# Altium PCB ALCS_REMOTE v2.PcbDoc
Units mil, origin at the board's own origin, x right, y up, seen from the top; angles counter-clockwise.
Board outline 3930 x 4525 mil, 2 copper layers (Top Layer, Bottom Layer); 59 components, 58 nets, 266 pads, 20 vias.
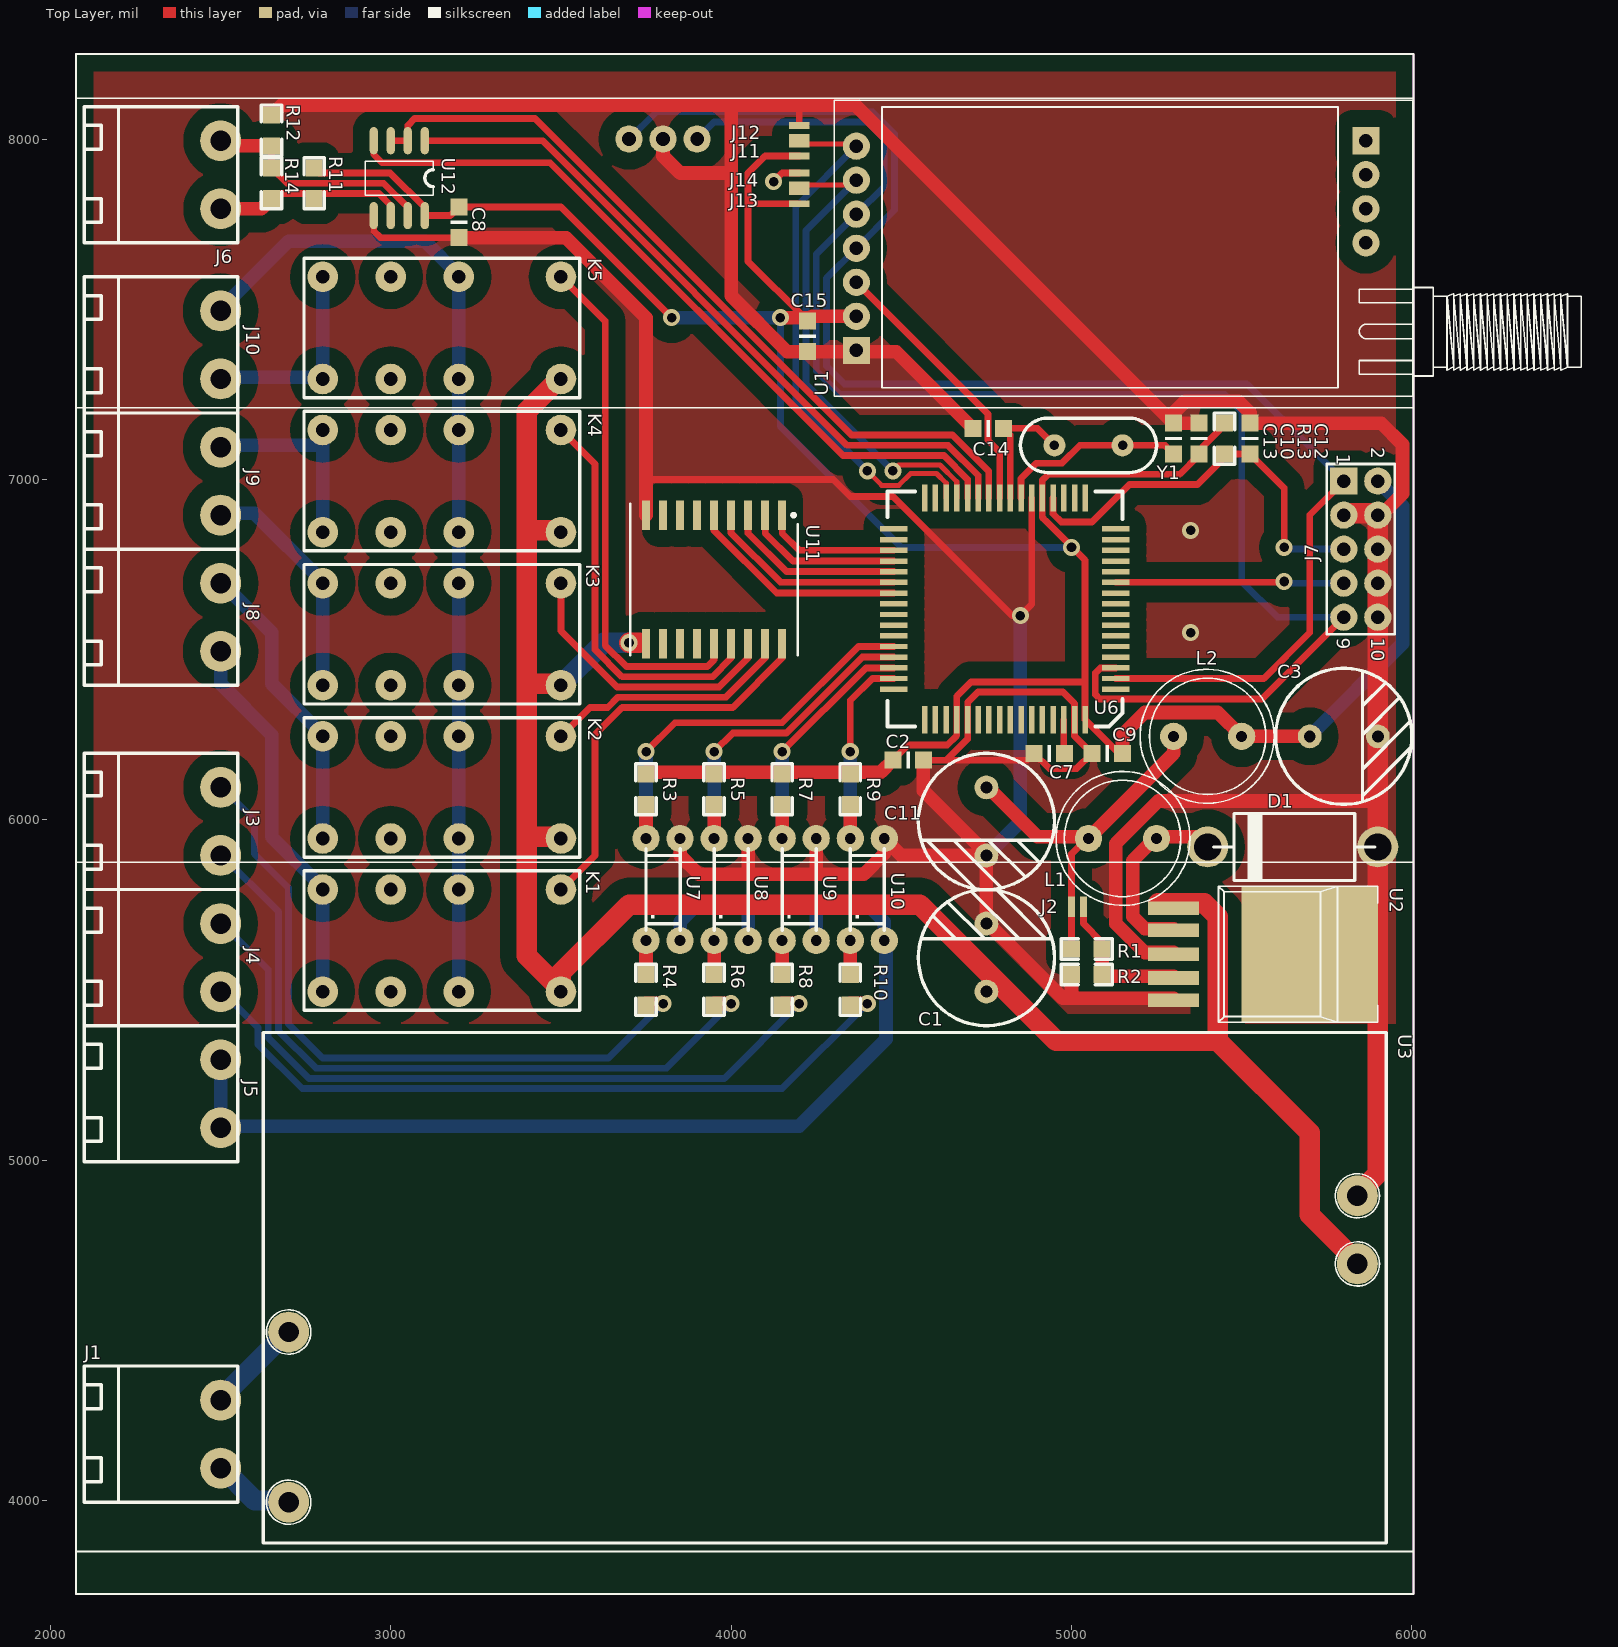
[diagram p0: Top Layer view]
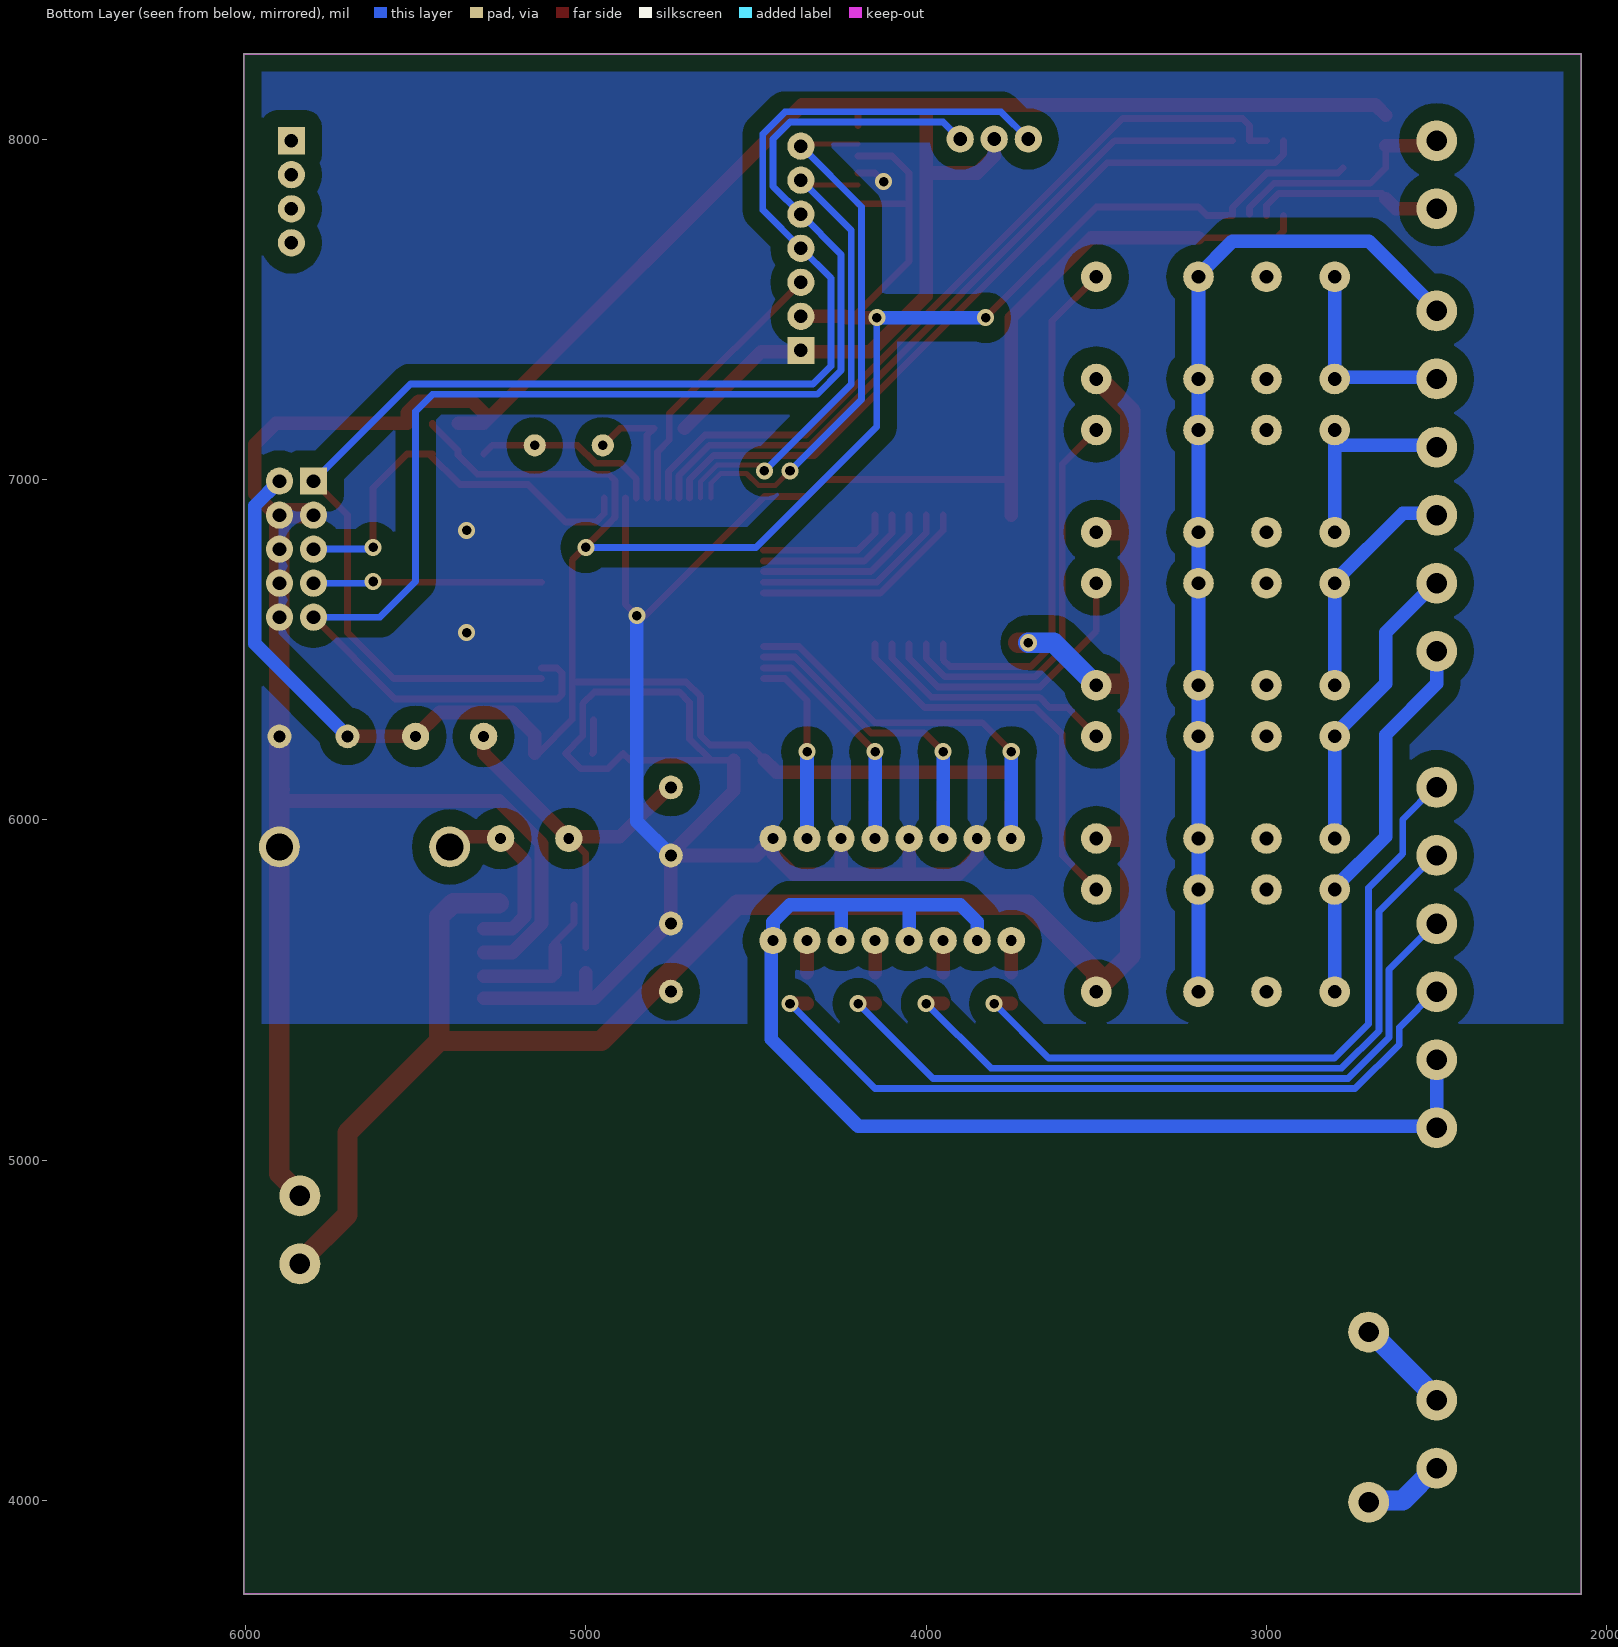
[diagram p1: Bottom Layer view, seen from below]
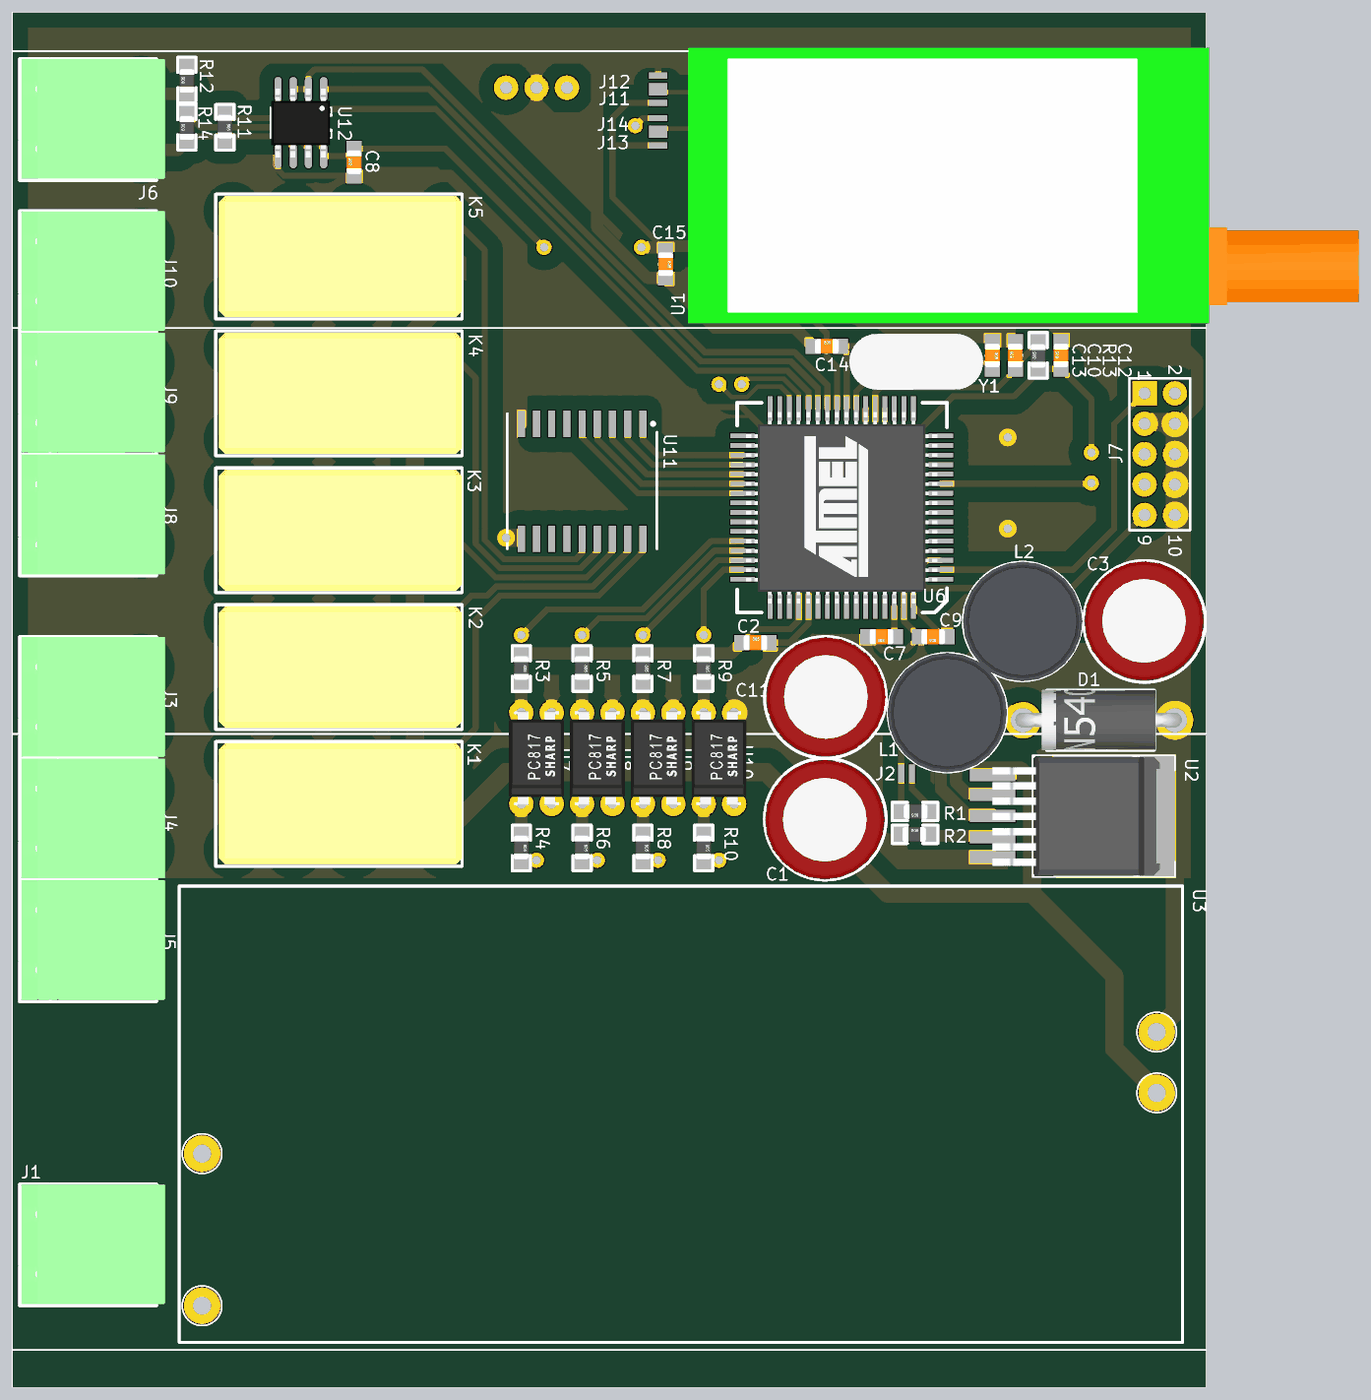
[diagram p2: 3D render of the assembled board from above, using the file's embedded part models]

## Layer stack, top to bottom
Top Solder: solder mask 0.4, Solder Resist, Dk 3.5
Top Layer: signal copper 1.4
Dielectric 1: dielectric 12.6, FR-4, Dk 4.8
Bottom Layer: signal copper 1.4
Bottom Solder: solder mask 0.4, Solder Resist, Dk 3.5

## Board outline
2075,3725 6005,3725 6005,8250 2075,8250

## Design rules (kind name [scope] priority, off if disabled: settings)
Clearance [All] p1: gap=10 ignorepadtopadclearanceinfootprint=FALSE except(0: Arc-Hole Track-Hole SMDPad-Hole THPad-Hole Via-Hole Fill-Hole Poly-Hole Region-Hole Text-Hole; 50: Arc-Poly Track-Poly SMDPad-Poly THPad-Poly Via-Poly Fill-Poly Poly-Poly)
ComponentClearance [All] p1 off: gap=10 collisioncheckmode=3 verticalgap=10 showdistances=FALSE
Height [All] p1 off: minheight=0 maxheight=1000 prefheight=500
PolygonConnect [All] p1: connectstyle=Direct reliefconductorwidth=10 reliefentries=4 polygonreliefangle="90 Angle" airgapwidth=10
RoutingVias [All] p1: holewidth=28 width=50 viastyle="Through Hole" minholewidth=28 minwidth=50 maxholewidth=28 maxwidth=50
SolderMaskExpansion [All] p1: expansion=4
Width [All] p1: maxlimit=100 minlimit=10 preferedwidth=20
28 further rules are at their usual default settings.

## Components (designator, comment, footprint, x,y, rotation, side; value= is the part's Value field where it differs from the comment)
C1 "Tụ hóa chân cắm 1000uF 25V" CAP40X20 4750,5495 r90 top value="1000uF 25V"
C2 "Tụ hóa chân cắm 1000uF 25V" CAP40X20 4750,6095 r270 top value="1000uF 25V"
C3 "Tụ hóa chân cắm 1000uF 25V" CAP40X20 5700,6245 r0 top value="1000uF 25V"
C7 "Tụ điện dán 0805 104" 0805C 4980,6195 r180 top value=104
C8 "Tụ điện dán 0805 104" 0805C 3200,7710 r90 top value=104
C9 "Tụ điện dán 0805 104" 0805C 5150,6195 r180 top value=104
C10 "Tụ điện dán 0805 104" 0805C 5375,7075 r90 top value=104
C11 "Tụ điện dán 0805 104" 0805C 4475,6175 r0 top value=104
C12 "Tụ điện dán 0805 104" 0805C 5525,7075 r90 top value=104
C13 "Tụ điện dán 0805 22p" 0805C 5300,7165 r270 top value=22p
C14 "Tụ điện dán 0805 22p" 0805C 4710,7150 r0 top value=22p
C15 "Tụ điện dán 0805 104" 0805C 4225,7465 r270 top value=104
D1 "Diode xung chân cắm 3A 1N5408" 1N5408 5950,5920 r180 top value=1N5408
J1 "Giắc xanh loại nằm, 300V/16A - 5.08mm 2P" JACK2_CAM 2500,4095 r90 top value=2P
J2 "Jumper OPTION JUMP" XPAD 5000,5745 r0 top value="OPTION JUMP"
J3 "Giắc xanh loại nằm, 300V/16A - 5.08mm 2P" JACK2_CAM 2500,5895 r90 top value=2P
J4 "Giắc xanh loại nằm, 300V/16A - 5.08mm 2P" JACK2_CAM 2500,5495 r90 top value=2P
J5 "Giắc xanh loại nằm, 300V/16A - 5.08mm 2P" JACK2_CAM 2500,5095 r90 top value=2P
J6 "Giắc xanh loại nằm, 300V/16A - 5.08mm 2P" JACK2_CAM 2500,7795 r90 top value=2P
J7 "Jump đực chân thẳng, 2 hàng chân 2.54mm 10P" HDR2x5 5800,6995 r270 top value=ICSP
J8 "Giắc xanh loại nằm, 300V/16A - 5.08mm 2P" JACK2_CAM 2500,6495 r90 top value=2P
J9 "Giắc xanh loại nằm, 300V/16A - 5.08mm 2P" JACK2_CAM 2500,6895 r90 top value=2P
J10 "Giắc xanh loại nằm, 300V/16A - 5.08mm 2P" JACK2_CAM 2500,7295 r90 top value=2P
J11 "Jumper OPTION JUMP" XPAD 4200,7985 r270 top value="OPTION JUMP"
J12 "Jumper OPTION JUMP" XPAD 4200,8040 r270 top value="OPTION JUMP"
J13 "Jumper OPTION JUMP" XPAD 4200,7845 r270 top value="OPTION JUMP"
J14 "Jumper OPTION JUMP" XPAD 4200,7900 r270 top value="OPTION JUMP"
K1 "Relay OMRON, 8 chân cắm G12V-2" Relay 3200,5495 r270 top value=G12V-2
K2 "Relay OMRON, 8 chân cắm G12V-2" Relay 3200,5945 r270 top value=G12V-2
K3 "Relay OMRON, 8 chân cắm G12V-2" Relay 3200,6395 r270 top value=G12V-2
K4 "Relay OMRON, 8 chân cắm G12V-2" Relay 3200,6845 r270 top value=G12V-2
K5 "Relay OMRON, 8 chân cắm G12V-2" Relay 3200,7295 r270 top value=G12V-2
L1 "Cuộn cảm chân cắm lõi trụ 330uH/3A" CAMTRONDUNG 5249.37,5945 r180 top value=330uH/3A
L2 "Cuộn cảm chân cắm lõi trụ 10uH/3A" CAMTRONDUNG 5300.63,6245 r0 top value=10uH/3A
R1 "Điện trở dán 0805 5K6" 0805DD 5090,5620 r180 top value=5K6
R2 "Điện trở dán 0805 1K8" 0805DD 5000,5545 r0 top value=1K8
R3 "Điện trở dán 0805 1K8" 0805DD 3750,6135 r270 top value=1K8
R4 "Điện trở dán 0805 4K7" 0805DD 3750,5545 r270 top value=4K7
R5 "Điện trở dán 0805 1K8" 0805DD 3950,6135 r270 top value=1K8
R6 "Điện trở dán 0805 4K7" 0805DD 3950,5545 r270 top value=4K7
R7 "Điện trở dán 0805 1K8" 0805DD 4150,6135 r270 top value=1K8
R8 "Điện trở dán 0805 4K7" 0805DD 4150,5545 r270 top value=4K7
R9 "Điện trở dán 0805 1K8" 0805DD 4350,6135 r270 top value=1K8
R10 "Điện trở dán 0805 4K7" 0805DD 4350,5545 r270 top value=4K7
R11 "Điện trở dán 0805 1K" 0805DD 2775,7915 r270 top value=1K
R12 "Điện trở dán 0805 1K" 0805DD 2650,7980 r90 top value=1K
R13 "Điện trở dán 0805 100K" 0805DD 5450,7075 r90 top value=100K
R14 "Điện trở dán 0805 330R" 0805DD 2650,7825 r90 top value=330R
U1 "Module thu phát không dây RF E32-TTL-1W" RF_AS32 4368,7379 r0 top locked value=E32-TTL-1W
U2 "IC chuyển đổi nguồn, chân dán LM2576 ADJ" TO220_5CSMD2 5300,5740 r270 top value="LM2576 ADJ"
U3 "Module nguồn AC-DC 14.2V" PS15V2A 2700,3995 r0 top value="POWER SUPPLY"
U6 "Vi điều khiển ATMEL chân dán ATMEGA128" QFP64-3 5130,6384 r180 top locked value=ATMEGA128
U7 "Cách ly quang chân cắm TLP521-1" TLP521_1 3750,5645 r270 top value=TLP521-1
U8 "Cách ly quang chân cắm TLP521-1" TLP521_1 3950,5645 r270 top value=TLP521-1
U9 "Cách ly quang chân cắm TLP521-1" TLP521_1 4150,5645 r270 top value=TLP521-1
U10 "Cách ly quang chân cắm TLP521-1" TLP521_1 4350,5645 r270 top value=TLP521-1
U11 "IC đệm chân dán ULN2803" SO-J18/C9.6 3950,6706.02 r180 top value=ULN2803
U12 "IC truyền thông chân dán MAX485" SO-8 3100,7995 r270 top value=MAX485
Y1 "Thạch anh chân cắm 14.7456 MHz" XTAL 5150,7100 r180 top value="14.7456 MHz"

## Footprints (in the part's own frame and the unit in brackets; to place one, negate y for a bottom-side part, rotate by r counter-clockwise, add the part's x,y. Pads: shape width x height; smd on the part's side, far side on the other; paste and mask are expansions set on the pad)
1N5408 [mil]
  round 120 hole 80: 1(50,0) 2(550,0)
  silkscreen extent 59,-98 531,98, body extent 28,-100 575,98, height 229
0805C [mil]
  rect 50x50 smd: 1(0,0) 2(90,0)
  silkscreen extent 40,-25 50,25, body extent 6,-25 84,25, height 31
0805DD [mil]
  rect 50x50 smd: 1(0,0) 2(90,0)
  silkscreen extent -30,-30 120,30, body extent 4,-25 82,25, height 31
CAMTRONDUNG [mil]
  round 80 hole 32: 1(-0.63,0) 2(199.37,0)
  silkscreen extent -99,-197 294,197, body extent -98,-197 295,197, height 537
CAP40X20 [mil]
  round 70 hole 35: 1(0,0) 2(200,0)
  silkscreen extent -100,-200 300,200, body extent -99,-195 295,199, height 473
HDR2x5 [mil] "Connector; Header; 5x2 Position"
  rect 80x80 hole 40: 1(0,0)
  round 80 hole 40: 2(0,100) 3(100,0) 4(100,100) 5(200,0) 6(200,100) 7(300,0) 8(300,100) 9(400,0) 10(400,100)
  silkscreen extent -50,-50 450,150
JACK2_CAM [mil]
  round 120 hole 60: 1(0,0) 2(200,0)
  silkscreen extent -100,-50 300,400, body extent -95,-78 299,394, height 339
PS15V2A [mil]
  round 120 hole 60: 1(0,0) 2(0,500) 3(3140,900) 4(3140,700)
  silkscreen extent -75,-120 3225,1380
QFP64-3 [mil]
  rect 80x16 smd: 1(0,0) 2(0,-31) 3(0,-62) 4(0,-94) 5(0,-125) 6(0,-157) 7(0,-188) 8(0,-219) 9(0,-251) 10(0,-282) 11(0,-314) 12(0,-345) 13(0,-376) 14(0,-408) 15(0,-439) 16(0,-471) 33(652,-471) 34(652,-439) 35(652,-408) 36(652,-376) 37(652,-345) 38(652,-314) 39(652,-282) 40(652,-251) 41(652,-219) 42(652,-188) 43(652,-157) 44(652,-125) 45(652,-94) 46(652,-62) 47(652,-31) 48(652,0)
  rect 16x80 smd: 17(90,-561) 18(121,-561) 19(153,-561) 20(184,-561) 21(216,-561) 22(247,-561) 23(278,-561) 24(310,-561) 25(341,-561) 26(373,-561) 27(404,-561) 28(435,-561) 29(467,-561) 30(498,-561) 31(530,-561) 32(561,-561) 49(561,90) 50(530,90) 51(498,90) 52(467,90) 53(435,90) 54(404,90) 55(373,90) 56(341,90) 57(310,90) 58(278,90) 59(247,90) 60(216,90) 61(184,90) 62(153,90) 63(121,90) 64(90,90)
  silkscreen extent -20,-580 670,110, body extent 11,-549 641,81, height 44
Relay [mil]
  round 90 hole 40: 1(0,0) 2(0,-200) 3(0,-400) 4(-300,0) 5(-300,-200) 6(-300,-400) 7(0,300) 8(-300,300)
  silkscreen extent -355,-455 55,355, body extent -349,-445 49,355, height 449
RF_AS32 [mil]
  round 80 hole 40: 0(1497,316) 0(1497,416) 0(1497,516) 2(0,100) 3(0,200) 4(0,300) 5(0,400) 6(0,500) 7(0,600)
  rect 80x80 hole 40: 0(1497,616) 1(0,0)
  silkscreen extent -65,-135 2130,735, body extent -68,-154 2136,752, height 532
SO-8 [mil]
  oval 80x24 smd: 1(0,0) 2(0,-50) 3(0,-100) 4(0,-150) 5(220,-150) 6(220,-100) 7(220,-50) 8(220,0)
  silkscreen extent 60,-175 160,25, body extent -2,-172 225,21, height 57
SO-J18/C9.6 [mm] "SOJ; 18 Leads; Body Width 10.16 mm; Pitch 1.27 mm"
  rect 0.6x2.2 smd: 1(-5.08,-4.8) 2(-3.81,-4.8) 3(-2.54,-4.8) 4(-1.27,-4.8) 5(0,-4.8) 6(1.27,-4.8) 7(2.54,-4.8) 8(3.81,-4.8) 9(5.08,-4.8) 10(5.08,4.8) 11(3.81,4.8) 12(2.54,4.8) 13(1.27,4.8) 14(0,4.8) 15(-1.27,4.8) 16(-2.54,4.8) 17(-3.81,4.8) 18(-5.08,4.8)
  silkscreen extent -6.25,-5.65 6.25,5.65
TLP521_1 [mil]
  round 80 hole 32: 1(0,0) 2(0,100) 3(-300,100) 4(-300,0)
  silkscreen extent -270,0 -30,100, body extent -305,-40 5,140, height 138
TO220_5CSMD2 [mil]
  rect 40x150 smd: 1(0,0) 2(65,0) 3(135,0) 4(205,0) 5(270,0)
  rect 400x400 smd: 3(135,400)
  silkscreen extent -65,132 335,600, body extent -59,0 331,551, height 166
XPAD [mil]
  rect 20x60 smd: 1(0,0) 2(35,0)
XTAL [mil]
  round 65 hole 28: 1(0,0) 2(200,0)
  silkscreen extent -100,-80 300,80, body extent -119,-91 321,93, height 142

## Part data
C1 C2 C3: library part "Cap Pol1", "Polarized Capacitor (Radial)", Type1="T? hóa chân c?m", Type2="T? hóa chân dán"
C7 C8 C9 C10 C11 C12 C15: library part CAP, Type1="T? di?n dán 0805", Type2="T? di?n chân c?m"
C13 C14: library part Cap, Type1="T? di?n dán 0805", Type2="T? di?n chân c?m"
D1: library part DIODE, Type1="Diode xung chân c?m 3A", Type2="Diode ch?nh luu chân c?m 1A", Type3="Diode ch?nh luu chân c?m 3A"
J1 J2 J3 J4 J5 J6 J8 J9 J10 J11 J12 J13 J14: library part CON2, Type1="Gi?c xanh lo?i n?m, 300V/16A - 5.08mm", Type2="Jump d?c lo?i th?ng, 2.54mm", Type3=Jumper, Type4="Gi?c xanh lo?i n?m, 300V/16A - 3.81mm"
J7: library part "HEADER 5X2"
K1 K2 K3 K4 K5: library part Relay-DPDT, "Dual-Pole Dual-Throw Relay", Type1="Relay OMRON, 8 chân c?m"
L1 L2: library part INDUCTORSMALL, Type1="Cu?n c?m chân c?m lõi tr?", Type2="Cu?n c?m chân c?m lõi xuy?n"
R1 R2 R3 R4 R5 R6 R7 R8 R9 R10 R11 R12 R13 R14: library part "Res Semi", "Semiconductor Resistor", Type1="Ði?n tr? dán 0805", Type2="Ði?n tr? chân c?m 1/4W", Type3="Ði?n tr? chân c?m 2W"
U1: library part AS32-TTL-1W, "AS32-TTL-1W", Type1="Module thu phát không dây RF"
U2: library part LM2576, Type1="IC chuy?n d?i ngu?n, chân dán", Type2="IC chuy?n d?i ngu?n, chân c?m"
U3: library part SACACQUY
U6: library part ATmega64-16AC, "8-Bit AVR Microcontroller with 64K Bytes of In-System Programmable Flash Memory", Type1="Vi di?u khi?n ATMEL chân dán"
U7 U8 U9 U10: library part OPTOISO1, "Optoisolator", Type1="Cách ly quang chân c?m"
U11: library part ULN2803, Type1="IC d?m chân dán", Type2="IC d?m chân c?m"
U12: library part DS75176BN(8), "Multipoint RS-485/RS-422 Transceivers", Type1="IC truy?n thông chân dán", Type2="IC truy?n thông chân c?m"
Y1: library part XTAL, "Crystal Oscillator", Type1="Th?ch anh chân c?m", Type2="Th?ch anh chân dán"

## Free pads (board coordinates)
  round 80 hole 40: 0(3900,8000) 2(3700,8000) 3(3800,8000)

## Via types
v1: diameter 50, hole 28, Top Layer to Bottom Layer, 20 vias

## Nets (pads, with @x,y where several pads share a name; then routed paths per layer and width w, separated by ;. In a path a pad name is that pad's centre, name@x,y a point inside that pad or via, vN(x,y) a via of type N, cw(c..) or ccw(c..) an arc to the next point about the centre after c; other vN are vias at no path point)
+5: C2.1 J2.1 L1.2 L2.1 R1.2 | length 1086.4
  Top Layer w20: R1.2@5000,5625 5000,5900 L1.2@5050,5950
  Top Layer w40: C2.1@4750,6100 4900,5950 L1.2@5025,5950 ; L1.2 5300,6195 L2.1
A: J6.1 R11.2 R14.1 U12.6 | length 547
  Top Layer w20: R14.1@2660,7840 2965.15,7840 3000,7805.15 U12.6
  Top Layer w40: J6.1 2620,7795 R14.1
B: J6.2 R12.1 R14.2 U12.7 | length 689.9
  Top Layer w20: R12.1 R14.2 2695,7870 2978.25,7870 3050,7798.25 U12.7@3050,7780
  Top Layer w40: J6.2@2500,8000 2520,7980 R12.1
COMMON: J10.2 K1.1 K1.4 K2.1 K2.4 K3.1 K3.4 K4.1 K4.4 K5.1 K5.4 | length 2924.3
  Bottom Layer w40: J10.2@2500,7500 2700,7700 3100,7700 3200,7600 3200,7300 3200,7150 3200,6850 3200,6700 3200,6400 3200,6250 3200,5950 3200,5800 K1.1@3200,5500
DE/RE: U6.26 U12.2 U12.3 | length 2317.8
  Top Layer w20: U12.3 U12.2 3050,8040 3070,8060 3423.43,8060 4353.43,7130 4650,7130 4757,7023 U6.26
FB0: U6.35 U11.1 | length 401.9
  Top Layer w20: U11.1 4150,6841.69 4199.69,6792 U6.35
FB1: U6.36 U11.2 | length 465.1
  Top Layer w20: U11.2 4100,6841.69 4181.69,6760 U6.36
FB2: U6.37 U11.3 | length 528
  Top Layer w20: U11.3 4050,6841.69 4162.69,6729 U6.37
FB3: U6.38 U11.4 | length 590.4
  Top Layer w20: U11.4 4000,6842.43 4144.43,6698 U6.38
FB4: U6.39 U11.5 | length 649.2
  Top Layer w20: U11.5 3950,6850 4134,6666 U6.39
FB5: U11.6
FB6: U11.7
FB7: U11.8
GND: C1.2 C2.2 C3.2 C7.2 C8.1 C9.2 C10.2 C11.2 C12.2 C13.1 C14.1 C15.2 D1.1 J7.3 J7.4 J7.6 J7.8 J7.10 J12.1 J14.1 pad.3 R2.1 R12.2 U1.1 U2.3 U2.5 U3.3 U6.22 U6.53 U6.63 U7.3 U8.3 U9.3 U10.3 U11.9 U12.5 | length 17101.6
  Top Layer w20: U12.5 2950,7730 2970,7710 C8.1 ; 3750,7000 4300,7000 4350,6950 4475,6950 4825,6600 v1(4850,6600) 4883,6633 U6.22 ; v1(4125,7875) 4150,7900 J14.1 ; J12.1 4200,8095 4205,8100 ; C11.2 4632.43,6175 ; 4632.43,6175 4870,6175 C7.2 4935,6150 5015,6150 C9.2 5009,6246 U6.63 5009,6341 4975,6375 4725,6375 4695,6345 U6.53 4695,6237.57 4632.43,6175
  Top Layer w40: R12.2 2680,8100 4000,8100 ; C8.1 3515,7710 3750,7475 3750,7000 U11.9 ; pad.3 3800,7950 3850,7900 4000,7900 ; U7.3 3850,5895 3905,5840 4050,5840 ; U8.3 4050,5840 ; U9.3@4250,5950 4250,5840 ; C11.2 4565,6085 4750,5900 C2.2 ; C14.1 4485,7375 C15.2 4165,7375 4000,7540 4000,7900 ; R2.1@5000,5550 5000,5475 ; U2.5@5300,5475 5000,5475 ; U2.3@5300,5610 5215,5610 5130,5695 5130,5930 5255,6055 5900,6055 ; C10.2 C13.1 ; 5888.75,6088.75 5900,6100 ; J7.4@5910,6895 5972.5,6957.5 5972.5,7102.5 5910,7165 C12.2 5525,7195 5490,7230 5335,7230 5300,7195 C13.1 ; 4000,7900 4000,8100 ; 4000,8100 4205,8100 4365,8100 C13.1 ; 4050,5840 4250,5840 ; 4250,5840 4390,5840 4450,5900 U10.3 4500,5895 C2.2 ; C2.2 4750,5700 4975,5475 5000,5475
  Top Layer w60: J7.3@5800,6900 5900,6900 J7.4 ; U3.3@5840,4900 5900,4960 5900,6100 C3.2 J7.10 J7.8 J7.6 J7.4 ; J7.4@5910,6895 J7.4
  Bottom Layer w40: C2.2 4850,5995 v1(4850,6600)
  other v1: 5350,6550 5350,6850
GND_REMOTE: J5.1 J5.2 U7.2 U8.2 U9.2 U10.2 | length 3499.1
  Bottom Layer w40: J5.2@2500,5300 2500,5100 4200,5100 4455,5355 4455,5405 4455,5645 4450,5650 4450,5700 4400,5750 4250,5750 ; U7.2@3850,5650 3850,5700 3900,5750 4050,5750 ; U8.2@4050,5650 4050,5750 ; U9.2@4250,5650 4250,5750 ; 4050,5750 4250,5750
MD0: J11.1 J12.2 U1.7 U6.30 | length 1605
  Top Layer w15: J11.1 4362,7985 U1.7 ; v1(4400,7025) 4442.5,6982.5 4492.6,6982.5 4527.6,7017.5 4603.25,7017.5 4632,6988.75 U6.30
  Bottom Layer w20: U1.7 4190,7801 4190,7235 v1(4400,7025)
MD1: J13.1 J14.2 U1.6 U6.29 | length 1458.5
  Top Layer w15: J14.2 4354,7865 U1.6 ; v1(4475,7025) 4492.5,7042.5 4613.61,7042.5 4663,6993.11 U6.29
  Bottom Layer w20: U1.6 4220,7731 4220,7280 v1(4475,7025)
NetC7_1: C7.1 U6.62 | length 100.2
  Top Layer w20: U6.62 4977,6198 C7.1
NetC13_2: C13.2 U6.23 Y1.1 | length 555.9
  Top Layer w20: U6.23 4852,7002 4897.5,7047.5 4971.75,7047.5 5024.25,7100 Y1.1 5275,7100 C13.2
NetC14_2: C14.2 U6.24 Y1.2 | length 384
  Top Layer w20: U6.24 4820,7130 C14.2 4900,7150 Y1.2
NetD1_2: D1.2 L1.1 U2.2 | length 558.4
  Top Layer w40: U2.2@5300,5680 5215.71,5680 5180,5715.71 5180,5880 5250,5950 5375,5950 D1.2@5400,5925
NetJ1_1: J1.1 U3.1 | length 241.4
  Bottom Layer w60: J1.1@2500,4100 2600,4000 U3.1@2700,4000
NetJ1_2: J1.2 U3.2 | length 282.8
  Bottom Layer w60: J1.2@2500,4300 U3.2@2700,4500
NetJ2_2: J2.2 R1.1 R2.2 U2.4 | length 436.9
  Top Layer w20: J2.2@5035,5750 5035,5695 5090,5640 R1.1@5090,5625
  Top Layer w40: R1.1@5090,5625 5090,5550 5100,5540 U2.4@5300,5540
NetR4_1: R4.1 U7.1 | length 100
  Top Layer w40: R4.1@3750,5550 U7.1@3750,5650
NetR6_1: R6.1 U8.1 | length 100
  Top Layer w40: R6.1@3950,5550 U8.1@3950,5650
NetR8_1: R8.1 U9.1 | length 100
  Top Layer w40: R8.1@4150,5550 U9.1@4150,5650
NetR10_1: R10.1 U10.1 | length 100
  Top Layer w40: R10.1@4350,5550 U10.1@4350,5650
PDI: J7.1 pad.2 U1.4 U6.2 | length 4377.6
  Top Layer w20: U6.2 5565,6415 5700,6550 5700,6895 J7.1
  Bottom Layer w20: pad.2 3780,8080 4415,8080 4480,8015 4480,7791 U1.4 4280,7591 4280,7332.43 4332.43,7280 5515,7280 J7.1
PDO: J7.9 pad.0 U1.5 U6.3 | length 4461.8
  Top Layer w20: U6.3 5084.72,6446 5070,6431.28 5070,6367.72 5082.72,6355 5560,6355 J7.9
  Bottom Layer w20: pad.0 3950,8050 4400,8050 4450,8000 4450,7861 U1.5 4250,7661 4250,7320 4320,7250 5450,7250 5500,7200 5500,6700 5605,6595 J7.9
POWER: C1.1 K1.7 K2.7 K3.7 K4.7 K5.7 U2.1 U3.4 U11.10 | length 6069.5
  Top Layer w60: K2.7@3500,5950 3400,5950 ; K3.7@3500,6400 3400,6400 ; K4.7@3500,6850 3400,6850 ; K5.7@3500,7300 3400,7200 3400,6850 ; v1(3700,6520) 3730,6520 ; U2.1@5255,5755 5390,5755 5430,5715 5430,5350 ; U3.4@5840,4700 5700,4840 5700,5080 5430,5350 ; 3400,5950 3400,6400 ; 3400,5950 3400,5600 3500,5500 3500,5550 3700,5750 4555,5750 4955,5350 5430,5350 ; 3400,6400 3400,6850
  Bottom Layer w60: K3.7 3625,6520 v1(3700,6520)
REM_A: J3.2 R4.2 | length 2040.5
  Top Layer w40: R4.2@3750,5460 v1(3800,5460)
  Bottom Layer w20: J3.2@2500,6100 2600,6000 2600,5900 2700,5800 2700,5400 2800,5300 3640,5300 v1(3800,5460)
REM_B: J3.1 R6.2 | length 2094.7
  Top Layer w40: R6.2@3950,5460 v1(4000,5460)
  Bottom Layer w20: J3.1@2500,5900 2670,5730 2670,5380 2780,5270 3810,5270 v1(4000,5460)
REM_C: J4.2 R8.2 | length 2148.8
  Top Layer w40: R8.2@4150,5460 v1(4200,5460)
  Bottom Layer w20: J4.2@2500,5700 2640,5560 2640,5360 2760,5240 3980,5240 v1(4200,5460)
REM_FB0: J8.1 K1.3 K1.6 | length 1124.3
  Bottom Layer w40: J8.1@2500,6500 2500,6400 2650,6250 2650,5950 2800,5800 K1.3@2800,5500
REM_FB1: J8.2 K2.3 K2.6 | length 874.3
  Bottom Layer w40: J8.2@2500,6700 2650,6550 2650,6400 2800,6250 K2.3@2800,5950
REM_FB2: J9.1 K3.3 K3.6 | length 682.8
  Bottom Layer w40: J9.1@2500,6900 2600,6900 2800,6700 K3.3@2800,6400
REM_FB3: J9.2 K4.3 K4.6 | length 550
  Bottom Layer w40: J9.2@2500,7100 2800,7100 K4.3@2800,6850
REM_FB4: J10.1 K5.3 K5.6 | length 600
  Bottom Layer w40: J10.1@2500,7300 2800,7300 K5.6@2800,7600
REM_RST: J4.1 R10.2 | length 2203
  Top Layer w40: R10.2@4350,5460 v1(4400,5460)
  Bottom Layer w20: J4.1@2500,5500 2610,5390 2610,5340 2740,5210 4150,5210 v1(4400,5460)
RFAUX: U1.3 U6.25 | length 808.4
  Top Layer w20: U1.3 4755,7192 4755,7115 4789,7081 U6.25
RST: C12.1 J7.5 R13.1 U6.20 | length 1221.3
  Top Layer w20: U6.20 4946,6899 4970,6875 5060,6875 5170,6985 5370,6985 R13.1@5460,7075 ; R13.1 R13.1@5460,7075 ; v1(5625,6800) 5625,6975 C12.1 R13.1@5460,7075
  Bottom Layer w20: v1(5625,6800) 5630,6795 J7.5
RXD1: U6.27 U12.1 | length 2099.8
  Top Layer w20: U12.1 3446.01,7995 4341.01,7100 4637.43,7100 4726,7011.43 U6.27
SA: R3.2 U6.44 U7.4 | length 1206
  Top Layer w20: v1(3750,6200) 3835,6285 4150,6285 4374,6509 U6.44
  Top Layer w40: U7.4@3750,5950 R3.2@3750,6050
  Bottom Layer w40: U7.4@3750,5950 v1(3750,6200)
SB: R5.2 U6.45 U8.4 | length 997.3
  Top Layer w20: v1(3950,6200) 4005,6255 4162.43,6255 4385.43,6478 U6.45
  Top Layer w40: U8.4@3950,5950 R5.2@3950,6050
  Bottom Layer w40: U8.4@3950,5950 3945,5955 3950,5960 v1(3950,6200)
SC: R7.2 U6.46 U9.4 | length 779.9
  Top Layer w20: v1(4150,6200) 4396,6446 U6.46
  Top Layer w40: U9.4@4150,5950 R7.2@4150,6050
  Bottom Layer w40: U9.4@4150,5950 v1(4150,6200)
SCK: J7.7 U6.11 | length 672.9
  Top Layer w20: U6.11 5623,6698 v1(5625,6700)
  Bottom Layer w20: v1(5625,6700) 5630,6695 J7.7
SRST: R9.2 U6.47 U10.4 | length 654.9
  Top Layer w20: v1(4350,6200) 4350,6350 4415,6415 U6.47
  Top Layer w40: U10.4@4350,5950 R9.2@4350,6050
  Bottom Layer w40: U10.4@4350,5950 v1(4350,6200)
TXD1: U6.28 U12.4 | length 2235.6
  Top Layer w20: U12.4 2950,7955 2975,7930 3468.58,7930 4328.58,7070 4625,7070 4695,7000 U6.28
ULN_FB0: K1.8 U11.18 | length 1181.7
  Top Layer w20: K1.8 3600,5895 3600,6250 3680,6330 4005,6330 4150,6475 U11.18
ULN_FB1: K2.8 U11.17 | length 737.3
  Top Layer w20: K2.8 3585,6330 3637.57,6330 3667.57,6360 3985,6360 4100,6475 U11.17
ULN_FB2: K3.8 U11.16 | length 835.6
  Top Layer w20: K3.8 3500,6555 3665,6390 3965,6390 4050,6475 U11.16
ULN_FB3: K4.8 U11.15 | length 1184.4
  Top Layer w20: K4.8 3600,7045 3600,6500 3680,6420 3945,6420 4000,6475 U11.15
ULN_FB4: K5.8 U11.14 | length 1537.6
  Top Layer w20: K5.8 3630,7465 3630,6512.43 3692.43,6450 3930,6450 3950,6470 U11.14
ULN_FB5: U11.13
ULN_FB6: U11.12
ULN_FB7: U11.11
VCC: C3.1 C8.2 C9.1 C10.1 C11.1 C15.1 J7.2 J11.2 J13.2 L2.2 R3.1 R5.1 R7.1 R9.1 R11.1 R13.2 U1.2 U6.21 U6.52 U6.64 U12.8 | length 8482.8
  Top Layer w20: R11.1 2790,7900 2998.25,7900 3100,7798.25 U12.8 3175,7775 C8.2 3500,7800 v1(3825,7475) ; J13.2 4050,7810 ; J11.2 4100,7950 4050,7900 4050,7810 ; C15.1@4215,7475 4050,7640 4050,7810 ; C11.1 4520,6220 4635,6220 4663,6248 U6.52 4663,6363 4705,6405 5040,6405 ; 4919.57,6883 4914,6888.57 U6.21 4914,6996.5 4932.5,7015 5318.28,7015 5375,7071.72 C10.1 5375,7085 5450,7160 R13.2 ; 4925,6877.57 5040,6762.57 5040,6405 ; C9.1 5139,6195 U6.64 5040,6405
  Top Layer w40: R3.1@3750,6140 4440,6140 C11.1 ; v1(4145,7475) 4215,7475 4235,7475 4239,7479 U1.2 ; C9.1 5150,6250 5215,6315 5430,6315 L2.2 C3.1
  Bottom Layer w20: v1(4145,7475) 4145,7155 4500,6800 v1(5000,6800)
  Bottom Layer w40: v1(3825,7475) v1(4145,7475) ; C3.1 5972.5,6517.5 5972.5,6922.5 J7.2
pads on no net: K1.2 K1.5 K2.2 K2.5 K3.2 K3.5 K4.2 K4.5 K5.2 K5.5 U1.0 U6.1 U6.4 U6.5 U6.6 U6.7 U6.8 U6.9 U6.10 U6.12 U6.13 U6.14 U6.15 U6.16 U6.17 U6.18 U6.19 U6.31 U6.32 U6.33 U6.34 U6.40 U6.41 U6.42 U6.43 U6.48 U6.49 U6.50 U6.51 U6.54 U6.55 U6.56 U6.57 U6.58 U6.59 U6.60 U6.61

## Polygon pours and split planes (outlines as drawn)
GND on Bottom Layer "Top Layer-No Net" (solid, remove dead copper, pour order 0): 2075,8250 6005,8250 6005,3725 6005,5400 2075,5400
GND on Top Layer "Top Layer-No Net" (solid, remove dead copper, pour order 2): 2075,8250 6005,8250 6005,3725 6005,5400 2075,5400

## Keep-outs
Keep-Out Layer:
  the board outline again, w5

## Silkscreen, mask and mechanical layers (free items; w line width, h text height)
Top Overlay:
  lines w5: 2075,3850 6005,3850 ; 2075,5875 6005,5875 ; 2075,7210 6005,7210 ; 2075,8120 6005,8120 ; 2075,3725 2075,8250 6005,8250 6005,3725 2075,3725

## Text inside footprints (layer, text, board x,y; h text height)
J7: Top Overlay "2" at 5880,7095 h40 r270; Top Overlay "1" at 5780,7075 h40 r270; Top Overlay "9" at 5780,6535 h40 r270; Top Overlay "10" at 5880,6535 h40 r270